# Altium PCB MAX31855 Card.PcbDoc
Units mm, origin at the board's own origin, x right, y up, seen from the top; angles counter-clockwise.
Board outline 60 x 25 mm, 2 copper layers (Top Layer, Bottom Layer), stack 1.621 mm thick; 10 components, 18 nets, 101 pads, 23 vias.
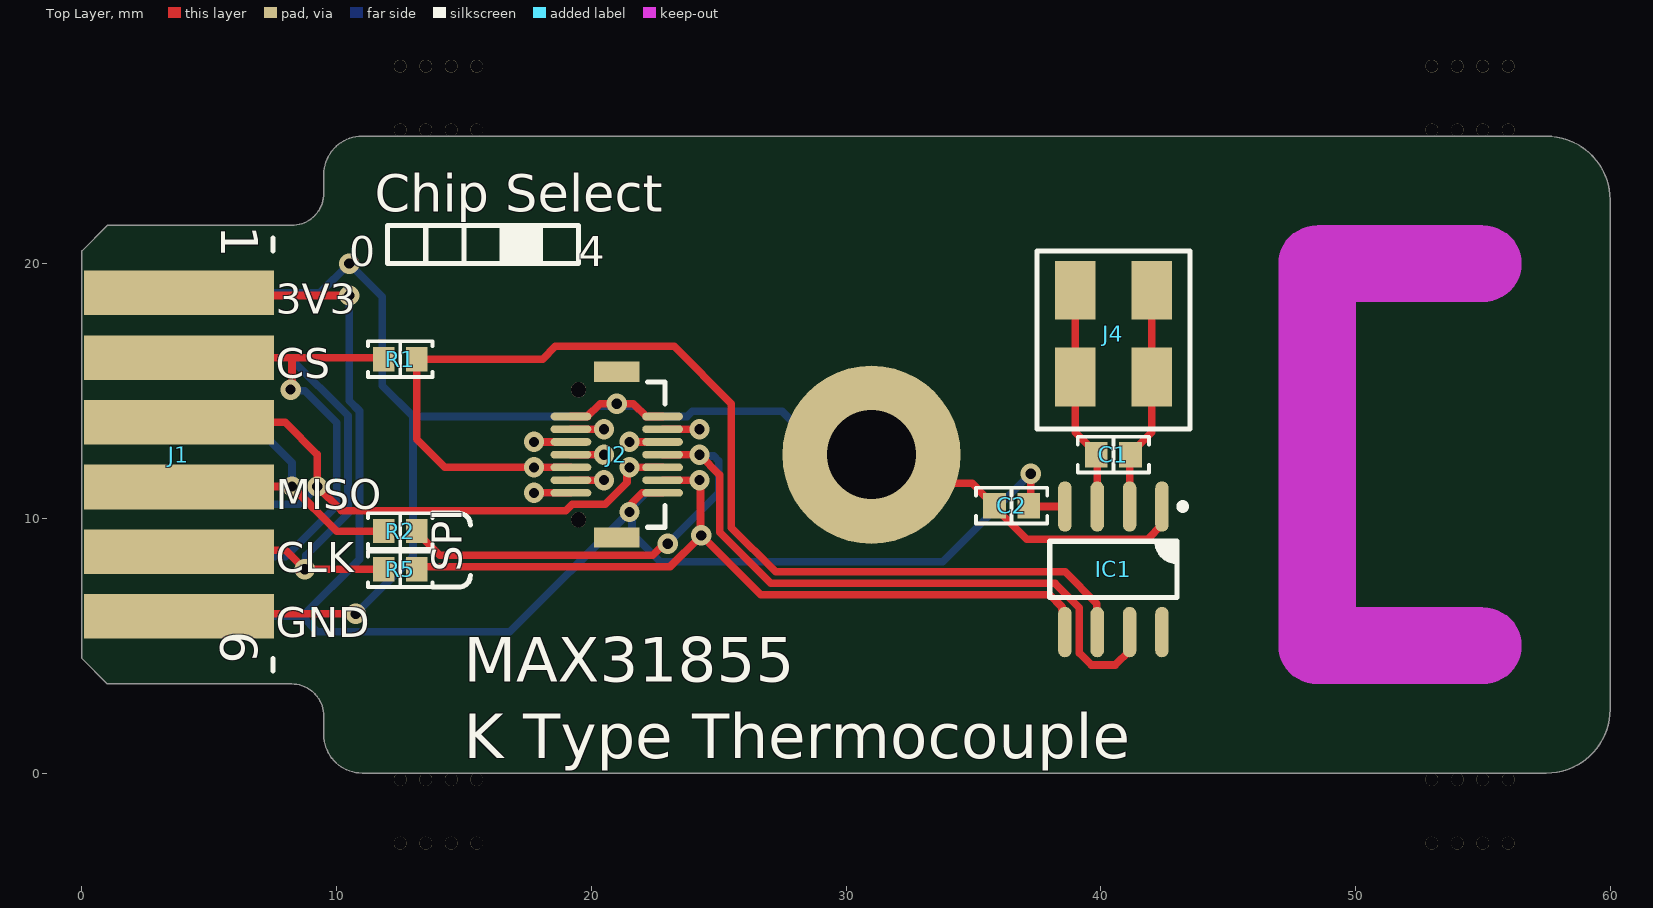
[diagram p0: Top Layer view]
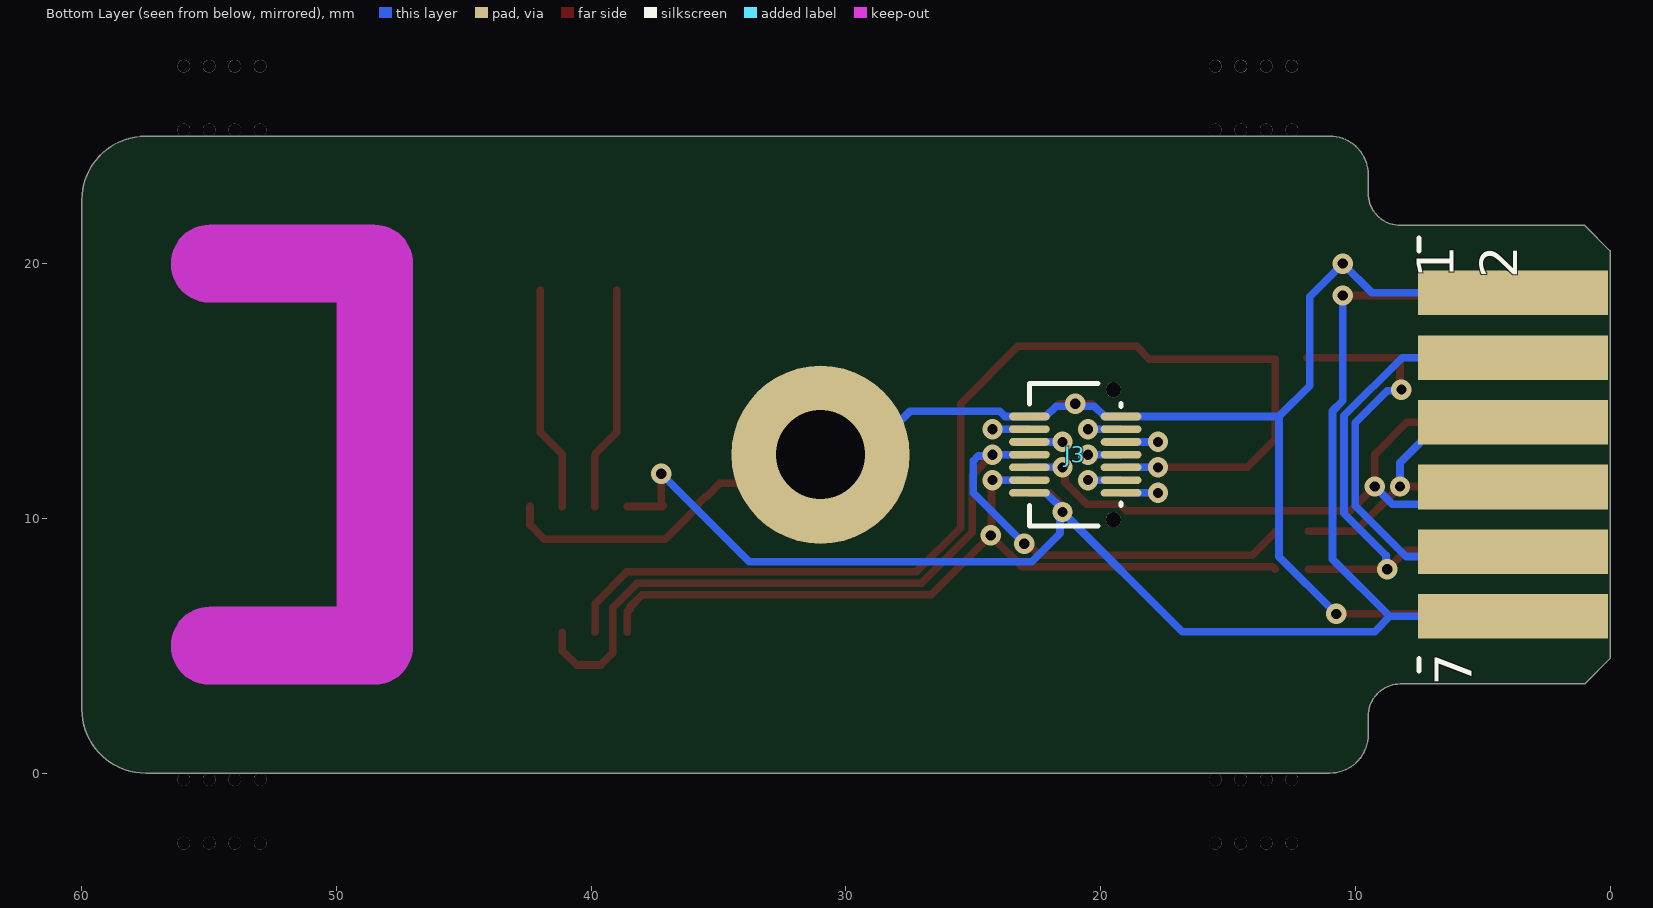
[diagram p1: Bottom Layer view, seen from below]
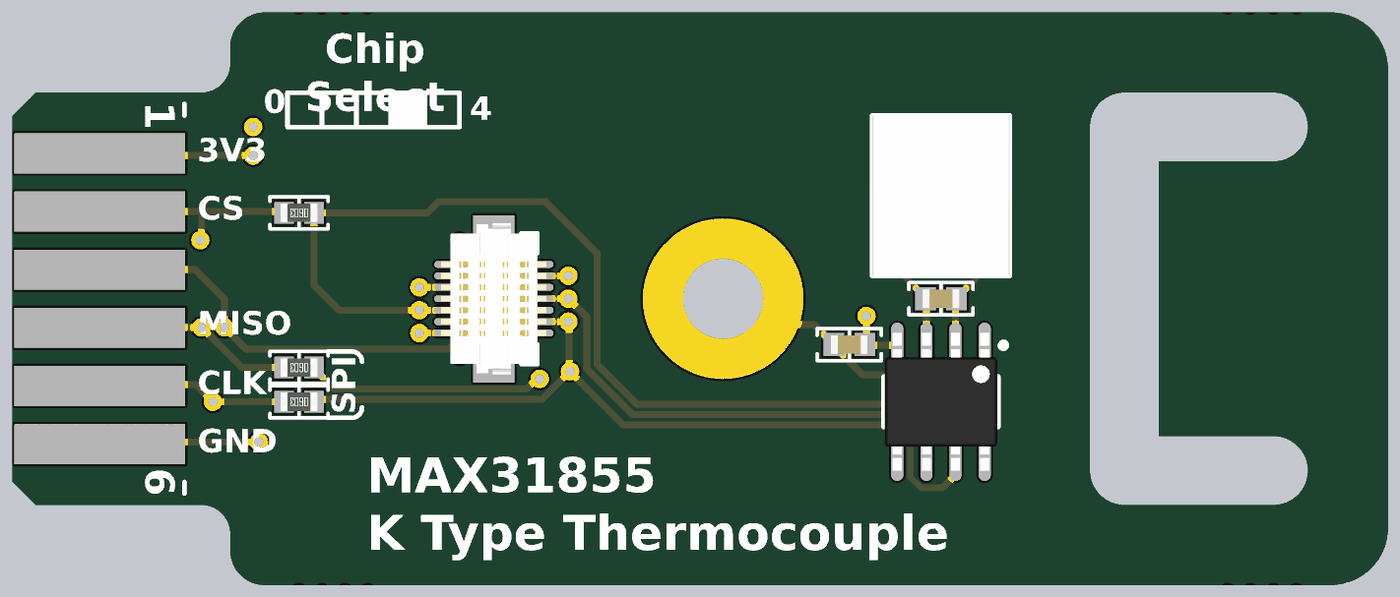
[diagram p2: 3D render of the assembled board from above, using the file's embedded part models]

## Layer stack, top to bottom
Top Solder: solder mask 0.0102, Solder Resist, Dk 3.5
Top Layer: signal copper 0.0356
Dielectric1: core 1.55, FR-4, Dk 4.8
Bottom Layer: signal copper 0.0356
Bottom Solder: solder mask 0.0102, Solder Resist, Dk 3.5

## Board outline
0,4.5 1,3.5 8.23,3.5 cw(c8.23,2.23) 9.5,2.23 9.5,1.5 ccw(c11,1.5) 11,0 57.5,0 ccw(c57.5,2.5) 60,2.5 60,22.5 ccw(c57.5,22.5) 57.5,25 11,25 ccw(c11,23.5) 9.5,23.5 9.5,22.77 cw(c8.23,22.77) 8.23,21.5 1,21.5 0,20.5
cut-out: 47,5 47,20 cw(c48.5,20) 48.5,21.5 55,21.5 cw(c55,20) 56.5,20 cw(c55,20) 55,18.5 50,18.5 50,6.5 55,6.5 cw(c55,5) 56.5,5 cw(c55,5) 55,3.5 48.5,3.5 cw(c48.5,5)

## Design rules (kind name [scope] priority, off if disabled: settings)
Clearance PadClearance [IsPad vs IsPad] p1: gap=0.15 ignorepadtopadclearanceinfootprint=FALSE
Clearance [All] p2: gap=0.15 ignorepadtopadclearanceinfootprint=FALSE
Height [All] p1: minheight=0 maxheight=2.9 prefheight=2.9
HoleSize [All] p1: absolutevalues=TRUE maxlimit=6 minlimit=0.4 maxpercent=80.000 minpercent=20.000
HoleToHoleClearance [All] p1: gap=0.2 allowstackedmicrovias=TRUE
MinimumSolderMaskSliver [All] p1: minsoldermaskwidth=0
PolygonConnect ViaConnect [IsVia] p1: connectstyle=Direct reliefconductorwidth=0.254 reliefentries=4 polygonreliefangle="90 Angle" airgapwidth=0.254
PolygonConnect [All] p2: connectstyle=Direct reliefconductorwidth=0.3 reliefentries=4 polygonreliefangle="90 Angle" airgapwidth=0.254
RoutingVias [All] p1: holewidth=0.6 width=1 viastyle="Through Hole" minholewidth=0.4 minwidth=0.8 maxholewidth=5 maxwidth=6
SilkToSilkClearance [All] p1: silktosilkclearance=0
SilkToSolderMaskClearance SilkscreenOverComponentPads [IsPad] p1: minsilkscreentomaskgap=0.05 clearancetoexposedcopper=TRUE
SolderMaskExpansion "Via Tenting" [IsVia] p1: expansion=-2 istentingtop=FALSE
SolderMaskExpansion [All] p2: expansion=0.102 istentingtop=FALSE
Width [All] p1: maxlimit=2 minlimit=0.2 preferedwidth=0.4
24 further rules are at their usual default settings.

## Components (designator, comment, footprint, x,y, rotation, side; value= is the part's Value field where it differs from the comment)
C1 "10000pF" "CAP 0603_1608" 40.5,12.5 r180 top
C2 "0.1µF" "CAP 0603_1608" 36.5,10.5 r180 top
IC1 "MAX31855KASA+T" "MAXIM SOIC-8 S8" 40.5,8 r270 top
J1 "12 Pin Dual Row" "TE 5650118-3 Card Edge" 0,12.5 r270 top
J2 "DF12(3.0)-14DP-0.5V(86)" "HIROSE DF12 3.0-14DP-0.5V 86" 21,12.5 r90 top
J3 "DF12A(3.0)-14DS-0.5V(81)" "HIROSE DF12A 3.0-14DS-0.5V 81" 21,12.5 r270 bottom
J4 "009296002202906" "AVX 9296002202806" 40.5,17 r180 top
R1 "0 Ohms" "RES 0603_1608" 12.5,16.25 r180 top
R2 "0 Ohms" "RES 0603_1608" 12.5,9.5 r180 top
R5 "0 Ohms" "RES 0603_1608" 12.5,8 r180 top

## Footprints (in the part's own frame and the unit in brackets; to place one, negate y for a bottom-side part, rotate by r counter-clockwise, add the part's x,y. Pads: shape width x height; smd on the part's side, far side on the other; paste and mask are expansions set on the pad)
"AVX 9296002202806" [mm] "POKE-HOME: LOW PROFILE HORIZONTAL"
  rect 1.6x2.3 smd: 1(-1.5,1.45) 1(-1.5,-1.95) 2(1.5,1.45) 2(1.5,-1.95)
  silkscreen extent -3,-3.5 3,3.5, body extent -3,-3.5 3,3.5, height 2.55
"CAP 0603_1608" [mm] "Chip Capacitor, 2-Leads, Body 1.60x0.80mm, IPC Medium Density"
  rect 0.9x1 smd: 1(-0.675,0) 2(0.675,0)
  silkscreen extent -1.4,-0.7 1.4,0.7, body extent -0.8,-0.41 0.8,0.41, height 0.82
"HIROSE DF12 3.0-14DP-0.5V 86" [mm] "14 Position Connector Header, 0.50mm Pitch,5.7x3.8mm Body"
  oval 0.3x1.6 smd: 1(-1.5,-1.8) 2(-1,-1.8) 3(-0.5,-1.8) 4(0,-1.8) 5(0.5,-1.8) 6(1,-1.8) 7(1.5,-1.8) 8(1.5,1.8) 9(1,1.8) 10(0.5,1.8) 11(0,1.8) 12(-0.5,1.8) 13(-1,1.8) 14(-1.5,1.8)
  round 0.6 hole 0.6 unplated: B(-2.55,1.5) B(2.55,1.5)
  rect 0.8x1.8 smd: M(-3.25,0) M(3.25,0)
  silkscreen extent -2.85,-1.9 2.85,-1.2, body extent -3.3,-2.3 3.3,2.3, height 2.3
"HIROSE DF12A 3.0-14DS-0.5V 81" [mm] "14 Position Connector Receptacle, 0.50mm Pitch,5.60x3.60mm Body"
  oval 0.3x1.6 smd: 1(1.5,-1.8) 2(1,-1.8) 3(0.5,-1.8) 4(0,-1.8) 5(-0.5,-1.8) 6(-1,-1.8) 7(-1.5,-1.8) 8(-1.5,1.8) 9(-1,1.8) 10(-0.5,1.8) 11(0,1.8) 12(0.5,1.8) 13(1,1.8) 14(1.5,1.8)
  round 0.6 hole 0.6 unplated: B(-2.55,1.5) B(2.55,1.5)
  silkscreen extent -2.8,-1.8 2.8,1.8, body extent -2.8,-2.3 2.8,2.3, height 2.2
"MAXIM SOIC-8 S8" [mm] "SOIC, 8-Leads, Body 4.90x3.90mm, Pitch 1.27mm, IPC Medium Density"
  oval 1.98x0.53 smd: 1(-2.465,1.905) 2(-2.465,0.635) 3(-2.465,-0.635) 4(-2.465,-1.905) 5(2.465,-1.905) 6(2.465,-0.635) 7(2.465,0.635) 8(2.465,1.905)
  silkscreen extent -2.59,-2.5 1.1,2.85, body extent -3.01,-2.45 3.01,2.45, height 1.5
"RES 0603_1608" [mm] "Chip Resistor, 2-Leads, Body 1.60x0.80mm, IPC Medium Density"
  rect 0.85x0.95 smd: 1(-0.65,0) 2(0.65,0)
  silkscreen extent -1.27,-0.7 1.27,0.7, body extent -0.8,-0.4 0.8,0.4, height 0.45
"TE 5650118-3 Card Edge" [mm] "Card Edge contacts for TE Connector"
  rect 1.75x7.46 smd: 1(-6.35,3.81) 2(-3.81,3.81) 3(-1.27,3.81) 4(1.27,3.81) 5(3.81,3.81) 6(6.35,3.81)
  rect 1.75x7.46 smd far side: 7(6.35,3.81) 8(3.81,3.81) 9(1.27,3.81) 10(-1.27,3.81) 11(-3.81,3.81) 12(-6.35,3.81)
  silkscreen extent -8.5,7.5 8.5,7.5

## Part data
C1: library part CGA3E2X7R2A103M080AA, "CAP CER 10000PF 100V X7R 0603", Device Package="0603 (1608 Metric)", Manufacturer="TDK Corporation", Operating Temperature="-55°C ~ 125°C", Ratings=AEC-Q200, Supplier Part Number 1=445-12526-1-ND, Temperature Coefficient=X7R, Tolerance=±20%, Voltage - Rated=100V, Applications=Automotive, Capacitance=10000pF, ComponentLink1Description=Datasheet, ComponentLink1URL=https://product.tdk.com/info/en/catalog/datasheets/mlcc_automotive_midvoltage_en.pdf?ref_disty=digikey, ComponentLink2Description="DigiKey Link", ComponentLink2URL=http://digikey.com/product-detail/en/tdk-corporation/CGA3E2X7R2A103M080AA/445-12526-1-ND/3954192, LastUpdated="02/09/2020 01:03:33", Lifecycle Status=Active, Minimum Order=1, Mounting Type="Surface Mount, MLCC", Package / Case="0603 (1608 Metric)", Packaging=TapeAndReel, Part Number=CGA3E2X7R2A103M080AA, Part Status=Active, PartId=3633, Price=0.01, Series=CGA, Size / Dimension="0.063\" L x 0.031\" W (1.60mm x 0.80mm)", Supplier 1=DigiKey, Thickness (Max)="0.035\" (0.90mm)"
C2: library part CC0603ZRY5V7BB104, "CAP CER 0.1UF 16V Y5V 0603", Device Package="0603 (1608 Metric)", Manufacturer=Yageo, Operating Temperature="-30°C ~ 85°C", Supplier Part Number 1=311-1369-1-ND, Temperature Coefficient="Y5V (F)", Tolerance="-20%, +80%", Voltage - Rated=16V, Applications="General Purpose", Capacitance=0.1µF, ComponentLink1Description=Datasheet, ComponentLink1URL=http://www.yageo.com/documents/recent/UPY-GPHC_Y5V_6.3V-to-50V_8.pdf, ComponentLink2Description="DigiKey Link", ComponentLink2URL=http://digikey.com/product-detail/en/yageo/CC0603ZRY5V7BB104/311-1369-1-ND/2103153, LastUpdated="21/01/2020 00:01:38", Lifecycle Status=Active, Minimum Order=1, Mounting Type="Surface Mount, MLCC", Package / Case="0603 (1608 Metric)", Packaging=TapeAndReel, Part Number=CC0603ZRY5V7BB104, Part Status=Active, PartId=17881, Price=0.01, Series=CC, Size / Dimension="0.063\" L x 0.031\" W (1.60mm x 0.80mm)", Supplier 1=DigiKey, Thickness (Max)="0.035\" (0.90mm)"
IC1: "IC CONV THERMOCOUPLE-DGTL 8SOIC", Current - Supply=900µA, Manufacturer="Maxim Integrated", Operating Temperature="-40°C ~ 125°C", Package / Case="8-SOIC (0.154\", 3.90mm Width)", Supplier Device Package=8-SOIC, Supplier Part Number 1=MAX31855KASA+TCT-ND, ComponentLink1Description=Datasheet, ComponentLink1URL=https://datasheets.maximintegrated.com/en/ds/MAX31855.pdf, ComponentLink2Description="DigiKey Link", ComponentLink2URL=http://digikey.com/product-detail/en/maxim-integrated/MAX31855KASA-T/MAX31855KASA-TCT-ND/2708805, Input Type="Thermocouple (Multiple)", LastUpdated="02/09/2020 01:27:08", Lifecycle Status=Active, Minimum Order=1, Mounting Type="Surface Mount", Output Type=Digital, Packaging=TapeAndReel, Part Number=MAX31855KASA+T, Part Status=Active, Price=3.35, Series=-, Supplier 1=DigiKey, Type="Thermocouple to Digital Converter"
J2: "CONN HDR 14POS SMD GOLD", Manufacturer="Hirose Electric Co Ltd", Supplier Part Number 1=H11701CT-ND, ComponentLink1Description=Datasheet, ComponentLink1URL=https://www.hirose.com/product/download/?distributor=digikey&type=specSheet&lang=en&num=DF12(3.0)-14DP-0.5V(86), ComponentLink2Description="DigiKey Link", ComponentLink2URL=http://digikey.com/product-detail/en/hirose-electric-co-ltd/DF12-3.0-14DP-0.5V-86/H11701CT-ND/2172493, Connector Type="Header, Outer Shroud Contacts", Contact Finish=Gold, Contact Finish Thickness="8.00µin (0.203µm)", Features="Board Guide, Solder Retention", Height Above Board="0.091\" (2.30mm)", LastUpdated="06/08/2020 22:47:47", Lifecycle Status=Active, Mated Stacking Heights=3mm, Minimum Order=1, Mounting Type="Surface Mount", Number of Positions=14, Number of Rows=2, Packaging=TapeAndReel, Part Number=DF12(3.0)-14DP-0.5V(86), Part Status=Active, Pitch="0.020\" (0.50mm)", Price=0.38, Series=DF12, Supplier 1=DigiKey
J3: "CONN RCPT 14POS SMD GOLD", Manufacturer="Hirose Electric Co Ltd", Supplier Part Number 1=H11713CT-ND, ComponentLink1Description=Datasheet, ComponentLink1URL=https://www.hirose.com/product/document?clcode=CL0537-0721-0-86&productname=DF12(3.0)-10DP-0.5V(86)&series=DF12&documenttype=Catalog&lang=en&documentid=D31693_en, ComponentLink2Description="DigiKey Link", ComponentLink2URL=http://digikey.com/product-detail/en/hirose-electric-co-ltd/DF12A-3.0-14DS-0.5V-81/H11713CT-ND/2172505, Connector Type="Receptacle, Center Strip Contacts", Contact Finish=Gold, Contact Finish Thickness="8.00µin (0.203µm)", Features="Board Guide", Height Above Board="0.087\" (2.20mm)", LastUpdated="06/08/2020 22:48:47", Lifecycle Status=Active, Mated Stacking Heights=3mm, Minimum Order=1, Mounting Type="Surface Mount", Number of Positions=14, Number of Rows=2, Packaging=TapeAndReel, Part Number=DF12A(3.0)-14DS-0.5V(81), Part Status=Active, Pitch="0.020\" (0.50mm)", Price=0.36, Series=DF12, Supplier 1=DigiKey
J4: "CONN WIRE POKE-IN 2POS SMD RA", Color=White, Manufacturer="AVX Corporation", Supplier Part Number 1=478-9533-1-ND, Board-Side Pitch="0.118\" (3.00mm)", Cable Pitch="0.118\" (3.00mm)", Cable Termination=Poke-In, ComponentLink1Description=Datasheet, ComponentLink1URL=http://datasheets.avx.com/PHLPHorizontal_00-9296.pdf, ComponentLink2Description="DigiKey Link", ComponentLink2URL=http://digikey.com/product-detail/en/avx-corporation/009296002202906/478-9533-1-ND/5161727, Connector Type="Individual Wires", Contact Finish=Tin, Features="Closed End", LastUpdated="01/05/2020 07:29:21", Lifecycle Status=Active, Minimum Order=1, Mounting Type="Surface Mount, Right Angle", Number of Positions=2, Number of Rows=1, Packaging=TapeAndReel, Part Number=009296002202906, Part Status=Active, Price=0.23, Series=9296, Supplier 1=DigiKey, Wire Gauge="20-26 AWG"
R1 R2 R5: library part ERJ-3GEY0R00V, "RES SMD 0 OHM JUMPER 1/10W 0603", Device Package="0603 (1608 Metric)", Manufacturer="Panasonic Electronic Components", Operating Temperature="-55°C ~ 155°C", Power (Watts)="0.1W, 1/10W", Ratings=AEC-Q200, Supplier Device Package=0603, Supplier Part Number 1=P0.0GCT-ND, Tolerance=Jumper, ComponentLink1Description=Datasheet, ComponentLink1URL=http://industrial.panasonic.com/www-cgi/jvcr13pz.cgi?E+PZ+3+AOA0001+ERJ3GEY0R00V+7+WW, ComponentLink2Description="DigiKey Link", ComponentLink2URL=http://digikey.com/product-detail/en/panasonic-electronic-components/ERJ-3GEY0R00V/P0.0GCT-ND/134711, Composition="Thick Film", Features="Automotive AEC-Q200", Height - Seated (Max)="0.022\" (0.55mm)", LastUpdated="13/08/2020 10:36:40", Lifecycle Status=Active, Minimum Order=1, Number of Terminations=2, Package / Case="0603 (1608 Metric)", Packaging=CutTape, Part Number=ERJ-3GEY0R00V, Part Status=Active, PartId=22603, Price=0.10, Resistance="0 Ohms", Series=ERJ, Size / Dimension="0.063\" L x 0.031\" W (1.60mm x 0.80mm)", Supplier 1=DigiKey

## Free pads (board coordinates)
  round 7 hole 3.5: M(31,12.5)
  round 0.5 hole 0.5 unplated: N(12.5,-2.75) N(12.5,-0.25) N(12.5,25.25) N(12.5,27.75) N(13.5,-2.75) N(13.5,-0.25) N(13.5,25.25) N(13.5,27.75) N(14.5,-2.75) N(14.5,-0.25) N(14.5,25.25) N(14.5,27.75) N(15.5,-2.75) N(15.5,-0.25) N(15.5,25.25) N(15.5,27.75) N(53,-2.75) N(53,-0.25) N(53,25.25) N(53,27.75) N(54,-2.75) N(54,-0.25) N(54,25.25) N(54,27.75) N(55,-2.75) N(55,-0.25) N(55,25.25) N(55,27.75) N(56,-2.75) N(56,-0.25) N(56,25.25) N(56,27.75)

## Via types
v1: diameter 0.8, hole 0.4, Top Layer to Bottom Layer, 23 vias

## Nets (pads, with @x,y where several pads share a name; then routed paths per layer and width w, separated by ;. In a path a pad name is that pad's centre, name@x,y a point inside that pad or via, vN(x,y) a via of type N, cw(c..) or ccw(c..) an arc to the next point about the centre after c; other vN are vias at no path point)
3V3: C2.1 IC1.4 J1.1 J1.7 J2.1 J3.1 | length 64.9
  Top Layer w0.3: J1.1 3.91,18.75 v1(10.5,18.75) ; v1(21.5,10.25) 21.596,10.346 21.596,10.596 22,11 J2.1 ; v1(37.25,11.75) 37.25,10.575 C2.1 37.21,10.465 IC1.4
  Bottom Layer w0.3: J1.7 8.65,6.15 ; v1(10.5,18.75) 10.5,14.614 10.9,14.214 10.9,8.4 8.65,6.15 ; J3.1 22.15,11 21.5,10.35 v1(21.5,10.25) ; v1(37.25,11.75) 33.8,8.3 22.71,8.3 21.596,9.414 21.596,10.154 v1(21.5,10.25) ; 8.65,6.15 9.25,5.55 16.8,5.55 v1(21.5,10.25)
5V: J2.14 J3.14 | length 2.7
  Top Layer w0.3: v1(17.75,11) J2.14
  Bottom Layer w0.3: v1@18,11 J3.14
CS: J1.2 J1.8 R1.2 | length 22.1
  Top Layer w0.3: J1.2 8.25,16.31 ; v1(8.194,15.056) 8.25,15.111 8.25,16.31 ; R1.2@11.899,16.31 8.25,16.31
  Bottom Layer w0.3: J1.8 4,8.5 8,8.5 10,10.5 10,13.75 8.745,15.005 8.245,15.005 v1(8.194,15.056)
CS0: J2.5 J3.5 | length 2.6
  Top Layer w0.3: v1(21.5,13) J2.5
  Bottom Layer w0.3: v1(21.5,13) J3.5
CS1: J2.6 J3.6 | length 2.9
  Top Layer w0.3: J2.6 v1(24.25,13.5)
  Bottom Layer w0.3: J3.6 v1(24.25,13.5)
CS2: J2.13 J3.13 | length 2.6
  Top Layer w0.3: J2.13 v1(20.5,11.5)
  Bottom Layer w0.3: J3.13 v1(20.5,11.5)
CS3: IC1.6 J2.12 J3.12 R1.1 | length 46.2
  Top Layer w0.3: J2.12 v1(17.75,12) 14.25,12 13.15,13.1 R1.1 18.088,16.25 18.588,16.75 23.25,16.75 25.5,14.5 25.5,9.636 27.236,7.9 38.6,7.9 39.847,6.653 39.847,5.553 IC1.6
  Bottom Layer w0.3: v1(17.75,12) J3.12
CS4: J2.11 J3.11 | length 2.6
  Top Layer w0.3: J2.11 v1(20.5,12.5)
  Bottom Layer w0.3: J3.11 v1(20.5,12.5)
DCLK: J1.5 J1.11 R5.2 | length 22.7
  Top Layer w0.3: J1.5 3.87,8.75 8,8.75 v1(8.75,8) 10.75,8 R5.2
  Bottom Layer w0.3: J1.11 8.167,16.31 10.45,14.027 10.45,10.2 8.801,8.551 8.801,8.051 v1(8.75,8)
DD: J1.4 J1.10 R2.2 | length 13.4
  Top Layer w0.3: J1.4@5.238,11.23 5.258,11.25 v1(8.25,11.25) 10,9.5 R2.2
  Bottom Layer w0.3: J1.10 6.665,13.77 8.25,12.185 v1(8.25,11.25)
GND: C2.2 IC1.1 J1.6 J1.12 J2.7 J2.8 J3.7 J3.8 pad.M | length 66.9
  Top Layer w0.3: J1.6 3.91,6.25 v1(10.75,6.25) ; J2.8 19.85,14 20.35,14.5 v1(21,14.5) 21.65,14.5 22.15,14 J2.7 ; pad.M 32.125,11.375 34.95,11.375 35.475,10.85 35.525,10.85 35.825,10.55 C2.2 35.825,10.45 37.1,9.175 41.84,9.175 42.405,9.74 IC1.1
  Bottom Layer w0.3: J1.12 9.35,18.85 v1(10.5,20) 11.798,18.702 11.798,15.202 13,14 ; v1(10.75,6.25) 13,8.5 13,14 ; pad.M 29.187,12.5 27.487,14.2 23.96,14.2 23.76,14 22.15,14 21.746,14.404 21.096,14.404 v1(21,14.5) 20.904,14.404 20.254,14.404 19.85,14 13,14
I2C_SCL: J2.10 J3.10 | length 2.9
  Top Layer w0.3: v1(17.75,13) J2.10
  Bottom Layer w0.3: v1(17.75,13) J3.10
I2C_SDA: J2.9 J3.9 | length 2.6
  Top Layer w0.3: J2.9 v1(20.5,13.5)
  Bottom Layer w0.3: J3.9 v1(20.5,13.5)
MISO: IC1.7 J2.4 J3.4 R2.1 | length 41.9
  Top Layer w0.3: R2.1 13.15,9.45 14.05,8.55 22.415,8.55 22.865,9 v1(23,9) ; J2.4 v1(24.25,12.5) 25.05,11.7 25.05,9.45 27.05,7.45 38.204,7.45 39.16,6.494 39.16,4.716 39.631,4.245 40.57,4.245 41.135,4.81 IC1.7
  Bottom Layer w0.3: J3.4 v1(24.25,12.5) 24.301,12.449 24.801,12.449 25,12.25 25,11 v1(23,9)
MOSI: J1.3 J1.9 J2.3 J3.3 | length 29.5
  Top Layer w0.3: J1.3 7.98,13.77 9.245,12.505 v1(9.245,11.25) 10.195,10.3 19.001,10.3 19.251,10.55 20.54,10.55 21.404,11.414 21.404,11.904 v1(21.5,12) J2.3
  Bottom Layer w0.3: J1.9 4.49,10.55 8.545,10.55 v1(9.245,11.25) ; v1(21.5,12) J3.3
SCLK: IC1.5 J2.2 J3.2 R5.1 | length 33
  Top Layer w0.3: R5.1 13.25,8.1 23.09,8.1 v1@24.25,9.26 ; J2.2 v1(24.25,11.5) 24.285,11.465 v1@24.285,9.415 ; v1@24.37,9.38 24.37,9.282 26.652,7 38,7 38.48,6.52 38.48,6.437 38.595,6.322 IC1.5
  Bottom Layer w0.3: J3.2 v1(24.25,11.5)
  other v1: 24.321,9.331
TCN: C1.1 IC1.2 J4.1 | length 8.8
  Top Layer w0.3: IC1.2 41.135,12.51 42,13.375 42,15.55 J4.1@42,18.95
TCP: C1.2 IC1.3 J4.2 | length 8.8
  Top Layer w0.3: J4.2@39,18.95 39,15.55 39,13.375 39.825,12.55 C1.2 39.865,12.46 IC1.3
pads on no net: IC1.8 J2.B J2.M J3.B

## Keep-outs
Keep-Out Layer:
  lines w3: 55,5 48.5,5 48.5,20 55,20

## Silkscreen, mask and mechanical layers (free items; w line width, h text height)
Top Overlay:
  rectangle: 16.5,20 18,21.5
  region: 16.5,21.5
  lines w0.2: 13.77,7.3 14.8,7.3 ccw(c14.8,7.75) 15.25,7.75 ; 13.77,10.2 14.8,10.2 cw(c14.8,9.75) 15.25,9.75 ; 13.5,20 15,20 ; 13.5,20 12,20 12,21.5 13.5,21.5 ; 13.5,20 13.5,21.5 ; 13.5,21.5 15,21.5 ; 15,20 16.5,20 ; 15,20 15,21.5 ; 15,21.5 16.5,21.5 ; 16.5,20 18,20 ; 16.5,20 16.5,21.5 ; 16.5,21.5 18,21.5 ; 18,20 19.5,20 19.5,21.5 18,21.5 ; 18,20 18,21.5
  text "Chip Select" at 11.5,21.546 h2.5
  text "0" at 10.5,19.5 h2
  text "4" at 19.5,19.5 h2
  text "3V3" at 7.62,17.647 h2
  text "CS" at 7.62,15.104 h2
  text "MISO" at 7.62,9.959 h2
  text "SPI" at 15.297,7.907 h2 r90
  text "CLK" at 7.62,7.485 h2
  text "GND" at 7.62,4.945 h2
  text "MAX31855 / K Type Thermocouple" at 15,0 h3
Bottom Overlay:
  text "Digital Temperature Sensor Card" at 38,0 h5
Outlines:
  the board outline again, w0.2
Route Tool Path:
  lines w3: 11,-1.5 cw(c11,1.5) 8,1.5 8,2 1,2 ; 11,26.5 ccw(c11,23.5) 8,23.5 8,23 1,23 ; 17,-1.5 51.5,-1.5 ; 17,26.5 51.5,26.5 ; 55,5 48.5,5 48.5,20 55,20 ; 57.5,-1.5 ccw(c57.5,2.5) 61.5,2.5 61.5,22.5 ccw(c57.5,22.5) 57.5,26.5 ; -1.5,4.5 ccw(c0,4.5) -1.061,3.439 ; -1.5,4.5 ccw(c0,4.5) -1.061,3.439 ; -1.5,4.5 -1.5,20.5 ; -1.5,20.5 cw(c0,20.5) -1.061,21.561 ; -1.5,20.5 cw(c0,20.5) -1.061,21.561 ; -1.061,3.439 -0.061,2.439 ; -1.061,21.561 -0.061,22.561 ; -0.061,2.439 ccw(c1,3.5) 1,2 ; -0.061,2.439 ccw(c1,3.5) 1,2 ; -0.061,22.561 cw(c1,21.5) 1,23 ; -0.061,22.561 cw(c1,21.5) 1,23

## Text inside footprints (layer, text, board x,y; h text height)
J1: Top Overlay "6" at 4.936,5.576 h2.5 r270; Top Overlay "1" at 4.991,21.498 h2.5 r270; Bottom Overlay "1 / 2" at 3.155,19.424 h2.5 r270; Bottom Overlay "7" at 4.936,3.424 h2.5 r270